# Altium PCB 电源板5.PcbDoc (part 1 of 3)
Units mm, origin at the board's own origin, x right, y up, seen from the top; angles counter-clockwise.
Board outline 181.19 x 72.37 mm, 2 copper layers (Top Layer, Bottom Layer), stack 0.325 mm thick; 121 components, 93 nets, 519 pads, 51 vias.
Unrouted connection lines stored in the file: 1.
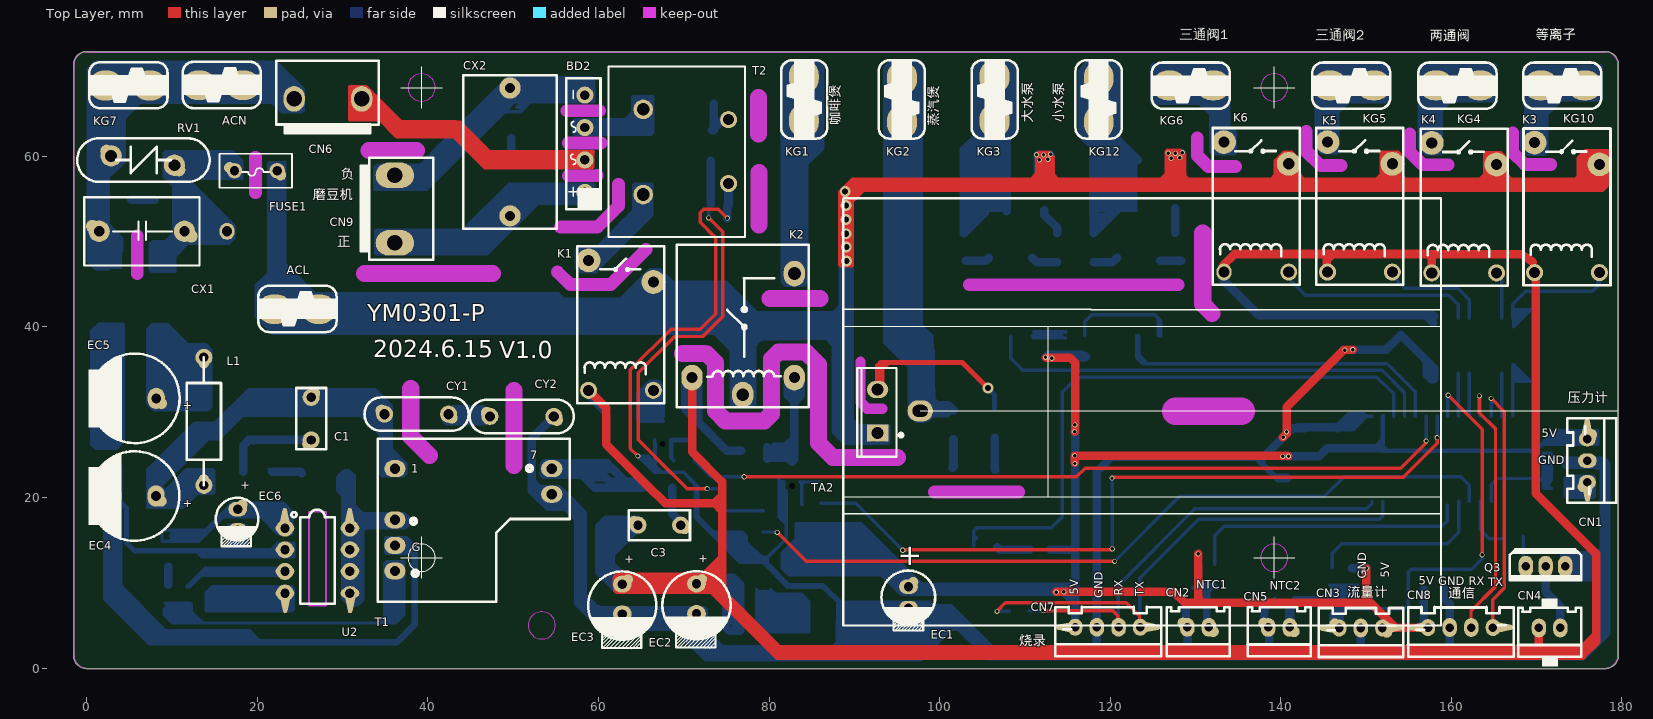
[diagram p0: Top Layer view]
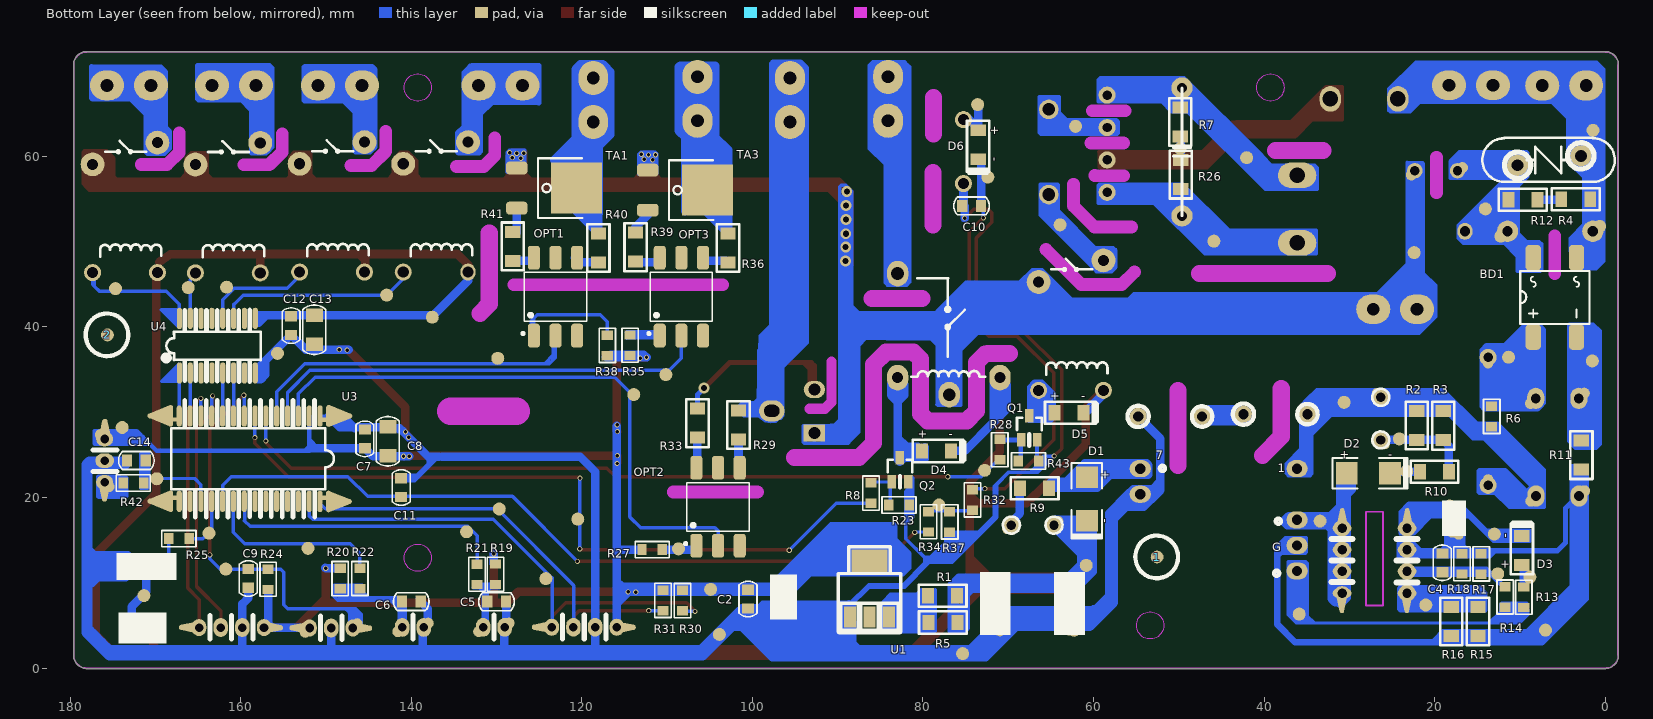
[diagram p1: Bottom Layer view, seen from below]

## Layer stack, top to bottom
Top Solder: solder mask 0.0102, Solder Resist, Dk 3.5
Top Layer: signal copper 0.0356
Dielectric 2: core 0.254, Dk 4.2
Bottom Layer: signal copper 0.0356
Bottom Solder: solder mask 0.0102, Solder Resist, Dk 3.5

## Board outline
-0.027,-0.064 cw(c0,1.5) -1.564,1.5 -1.564,70.738 cw(c0,70.738) 0,72.302 178.06,72.302 cw(c178.06,70.738) 179.624,70.738 179.624,1.501 cw(c179.56,1.494) 179.624,1.494 cw(c178.06,1.494) 179.624,1.462 179.624,1.404 cw(c179.56,1.404) 179.62,1.382 cw(c178.06,1.494) 178.079,-0.069 cw(c178.073,-0.006) 178.073,-0.07 0,-0.07 cw(c0,-0.006)

## Design rules (kind name [scope] priority, off if disabled: settings)
Clearance [All] p1: gap=0.4 ignorepadtopadclearanceinfootprint=FALSE except(0: Arc-Hole Track-Hole SMDPad-Hole THPad-Hole Via-Hole Fill-Hole Poly-Hole Region-Hole Text-Hole)
PolygonConnect [All] p1: connectstyle=Relief reliefconductorwidth=0.254 reliefentries=4 polygonreliefangle="90 Angle" airgapwidth=0.254
RoutingVias [All] p1: holewidth=0.4 width=0.6 viastyle="Through Hole" minholewidth=0.4 minwidth=0.6 maxholewidth=0.711 maxwidth=1.27
SolderMaskExpansion [All] p1: expansion=0.102 istentingtop=FALSE
Width [All] p1: maxlimit=1 minlimit=0.254 preferedwidth=0.4 minimp=50.000000 maximp=50.000000 favimp=50.000000
30 further rules are at their usual default settings.

## Components (designator, comment, footprint, x,y, rotation, side; value= is the part's Value field where it differs from the comment)
1 "MARK" MARK 52.546,13.019 r90 bottom
2 "MARK" MARK 175.645,39.064 r90 bottom
ACL "H1" 250 27.202,42.082 r180 top
ACN "H1" 250 18.319,68.348 r180 top
BD1 "DB107" DB107S 8.447,38.849 r90 bottom
BD2 "DB107" KBP410 58.405,55.786 r270 top
C1 "1nF/1KV" C5A 26.308,26.743 r90 top
C2 "100nF" C0805 100.516,8.085 r90 bottom
C3 "1nF/1KV" C5A 69.636,16.759 r180 top
C4 "47pF" C0805 19.093,12.336 r270 bottom
C5 "100nF" C0805 130.012,7.776 r0 bottom
C6 "100nF" C0805 140.012,7.788 r0 bottom
C7 "100nF" C0805 145.451,26.875 r90 bottom
C8 "10uF" C1206 142.765,26.59 r270 bottom
C9 "104" C0805 159.129,10.5 r270 bottom
C10 "100nF" C0805 74.302,54.191 r180 bottom
C11 "100nF" C0805 141.198,21.164 r90 bottom
C12 "100nF" C0805 154.101,40.155 r270 bottom
C13 "10uF" C1206 151.376,39.667 r90 bottom
C14 "104" C0805 172.253,24.338 r0 bottom
CN1 "JY-H600" CN-2.54-3-Z 175.969,26.857 r270 top
CN2 "MS Port" CN-2.54-2-Z 131.592,4.771 r180 top
CN3 "FM" CN-2.54-3-Z 151.946,4.692 r180 top
CN4 "LAMP" "CN2 (带扣)" 172.795,4.7 r180 top
CN5 "MS Port" CN-2.54-2-Z 141.074,4.761 r180 top
CN6 "AC-IN" VH-3A2#1 32.229,66.744 r180 top
CN7 "烧录" CN-2.54-4-Z 123.533,4.782 r180 top
CN8 "通信控制" CN-2.54-4-Z 164.904,4.747 r180 top
CN9 "AC-IN" VH-3A2#2 36.12,49.856 r90 top
CX1 "0.33uF/275V" "C-0.33uF-13/8 -AI" 6.443,51.218 r180 top
CX2 "0.68uF/275V" CX-18/11 49.628,53.022 r90 top
CY1 "222M/400V" "C-332-13/4A - AI" 34.916,29.771 r0 top
CY2 "222M/400V" "C-332-13/4A - AI" 47.267,29.503 r0 top
D1 "SS310" DO-214 60.783,19.827 r90 bottom
D2 "M7" DO-214 27.767,22.842 r0 bottom
D3 "F7" SOD-123 9.789,13.979 r270 bottom
D4 "F7" SOD-123 78.247,25.48 r0 bottom
D5 "F7" SOD-123 62.712,29.974 r0 bottom
D6 "F7" SOD-123 73.515,61.188 r90 bottom
EC1 "100uF/25V" EC6 96.36,9.533 r270 top
EC2 "470uF/25V" EC8 71.561,7.374 r270 top
EC3 "470uF/25V" EC8 62.865,7.329 r270 top
EC4 "10uF/400V" E-5-10-AI 8.111,20.173 r180 top
EC5 "10uF/400V" E-5-10-AI 8.138,31.625 r180 top
EC6 "10uF/50V" EC5 17.688,18.637 r270 top
FUSE1 "6.3A" FUSE-5/8.5/4 17.319,58.323 r0 top
K1 "GK32F-12VDC-S-A" REL-1#1 58.837,32.568 r90 top
K2 "GK32F-12VDC-S-A" RY-3FF 76.994,40.338 r90 top locked
K3 "GK32F-12VDC-S-A" REL-1#1 169.786,46.373 r90 top
K4 "GK32F-12VDC-S-A" REL-1#1 157.725,46.345 r90 top
K5 "GK32F-12VDC-S-A" REL-1#1 145.5,46.434 r90 top
K6 "GK32F-12VDC-S-A" REL-1#2 133.352,46.434 r90 top locked
KG1 "H2" 250 84.094,64.18 r90 top
KG2 "H2" 250 95.598,69.179 r270 top
KG3 "P1" 250 106.441,64.18 r90 top
KG4 "H1" 250 158.239,68.329 r0 top
KG5 "H1" 250 145.785,68.329 r0 top
KG6 "H1" 250 126.961,68.329 r0 top
KG7 "H1" 250 7.375,68.314 r180 top
KG10 "H1" 250 170.531,68.329 r0 top
KG12 "P1" 250 118.675,69.179 r270 top
L1 "1mH/0510" "R15/ 1W" 13.732,36.427 r270 top
OPT1 "MOC3021" 3021 125.648,39.182 r90 bottom
OPT2 "MOC3061" 3021 106.582,14.544 r90 bottom
OPT3 "MOC3021" 3021 110.884,39.182 r90 bottom
Q1 "2222A" SOT23-BCE 67.531,28.165 r270 bottom
Q2 "2222A" SOT23-BCE 82.709,23.244 r270 bottom
Q3 "D882" Q-TO126-ECB 171.066,11.917 r180 top
R1 "20R" R1206 76.019,8.524 r0 bottom
R2 "NC" R1206 22.073,26.768 r90 bottom
R3 "200K" R1206 18.959,26.744 r90 bottom
R4 "470K" R1206 5.124,54.936 r180 bottom
R5 "20R" R1206 75.991,5.374 r0 bottom
R6 "4.7K" R0805 13.305,29.504 r270 bottom
R7 "150K" R1206 49.788,62.368 r90 bottom
R8 "1K" R0805 86.092,20.508 r90 bottom
R9 "20R" R1206 68.586,21.054 r180 bottom
R10 "150R" R1206 21.699,22.996 r180 bottom
R11 "0R/1206" R1206 2.748,23.286 r90 bottom
R12 "470K" R1206 11.334,54.875 r180 bottom
R13 "10R" R0805 9.549,8.305 r270 bottom
R14 "22K/1%" R0805 11.723,8.328 r90 bottom
R15 "1.6R/1%" R1206 14.879,3.783 r90 bottom
R16 "1.6R/1%" R1206 18.08,7.13 r270 bottom
R17 "NC" R0805 14.539,12.209 r270 bottom
R18 "4.3K/1%" R0805 16.802,12.223 r270 bottom
R19 "10K/1%" R0805 130.137,11.002 r90 bottom
R20 "10K/1%" R0805 148.346,10.481 r90 bottom
R21 "4.7K" R0805 132.286,10.992 r90 bottom
R22 "4.7K" R0805 146.033,10.503 r90 bottom
R23 "10K" R0805 82.814,19.136 r0 bottom
R24 "4.7K" R0805 156.801,10.404 r270 bottom
R25 "1K" R0805 167.267,15.169 r180 bottom
R26 "150K" R1206 49.746,56.186 r90 bottom
R27 "510R" R0805 111.76,13.888 r0 bottom
R28 "1K" R0805 70.991,25.608 r90 bottom
R29 "180R" R1206 101.672,30.181 r270 bottom
R30 "10K" R0805 108.204,7.904 r270 bottom
R31 "10K" R0805 110.495,7.936 r270 bottom
R32 "2K" R0805 74.214,19.715 r270 bottom
R33 "180R" R1206 106.486,30.391 r270 bottom
R34 "1K" R0805 79.348,17.149 r90 bottom
R35 "510R" R0805 114.35,37.857 r270 bottom
R36 "180R" R1206 102.901,50.946 r270 bottom
R37 "2K" R0805 76.874,17.141 r270 bottom
R38 "510R" R0805 117.027,37.834 r270 bottom
R39 "180R" R1206 113.744,51.03 r270 bottom
R40 "180R" R1206 118.099,50.947 r270 bottom
R41 "180R" R1206 128.16,51.126 r270 bottom
R42 "1K" R0805 172.607,21.681 r180 bottom
R43 "10K" R0805 67.625,24.291 r0 bottom (schematic designator R?)
RV1 "10D471K" ZR-7.5-10 6.563,59.516 r180 top
T1 "XYT-E19135" EE19D 44.878,19.751 r90 top
T2 "TR-EE10B" 互感器 61.252,50.558 r90 top locked (schematic designator TR1)
TA1 "BT137" TO252 127.644,58.637 r270 bottom
TA2 "BTA16" 50*70 117.775,30.092 r0 top locked
TA3 "BT137" TO252 112.281,58.393 r270 bottom
U1 "AMS1117-5V" SOT-223 86.34,9.106 r270 bottom
U2 "PN6780H" DIP8 23.234,16.411 r270 top
U3 "OB38R16T1W28SP" SOP28-1.27 159.895,24.349 r270 bottom
U4 "ULN2003G" SOP16-1.27 167.203,34.602 r90 bottom

## Footprints (in the part's own frame and the unit in brackets; to place one, negate y for a bottom-side part, rotate by r counter-clockwise, add the part's x,y. Pads: shape width x height; smd on the part's side, far side on the other; paste and mask are expansions set on the pad)
50*70 [mm]
  rect 2.5x2 hole 1.4: 1(-25.035,-2.525)
  oval 3x2.5 hole 1.4 slot 1.8 at 0 deg: 2(-20.044,0.061)
  oval 2.5x2 hole 1.4: 3(-25.035,2.555)
  silkscreen extent -29.07,-25.11 41.05,25
250 [mm]
  oval 4x3.5 hole 1.5: 1(0,0) 1(5.151,0)
  silkscreen extent -2.09,-2.74 7.08,2.68
3021 [mm]
  rrect50% 2.8x1.422 smd: 1(-0.2,-0.008) 2(-0.2,-2.548) 3(-0.2,-5.088) 4(8.937,-5.088) 5(8.937,-2.548) 6(8.937,-0.008)
  silkscreen extent -0.11,-6.19 7.21,1.41
C5A [mm]
  oval 1.2x1.5 all layers, no hole rot 45: 1(-0.381,0.356) 2(5.385,-0.356)
  round 2 hole 1.1: 1(0,0) 2(5,0)
  silkscreen extent -1.1,-1.75 6.1,1.75
C0805 [mm]
  rect 1.2x1.4 smd: 1(-1.1,0) 2(1.1,0)
  silkscreen extent -2.08,-1.05 2.08,1.05
C1206 [mm]
  rect 1.6x2 smd: 1(-1.7,0) 2(1.7,0)
  silkscreen extent -2.91,-1.35 2.91,1.35
"C-0.33uF-13/8 -AI" [mm]
  round 1.5 all layers, no hole: 1(-5.8,0.584) 2(5.8,-0.584)
  round 2.5 hole 1.2: 1(-5,0) 2(5,0)
  silkscreen extent -6.75,-4 6.75,4
"C-332-13/4A - AI" [mm]
  oval 1.4x1.5 all layers, no hole rot 45: 1(-0.333,0.381) 2(7.833,-0.381)
  round 2 hole 1.2: 1(0,0) 2(7.5,0)
  silkscreen extent -2.36,-1.96 9.86,1.97
"CN2 (带扣)" [mm]
  oval 2x2.5 on Top Overlay: 1(0,0)
  oval 1.7x2.2 hole 1: 1(2.5,0) 2(0,0)
  silkscreen extent -2.45,-3.43 4.96,4.53
CN-2.54-2-Z [mm]
  round 0 all layers, no hole: 0(4.19,1.95)
  oval 1.7x2.2 hole 1: 1(2.54,0) 2(0,0)
  oval 1.3x1.5 all layers, no hole rot 45: 1(2.98,-0.424) 2(-0.44,0.424)
  oval 2x2.5 on Top Overlay: 2(0,0)
  silkscreen extent -2.45,-2.35 4.96,3.4
CN-2.54-3-Z [mm]
  round 0 all layers, no hole: 0(6.73,1.95)
  oval 1.7x2 hole 1: 1(5.08,0) 3(0,0)
  oval 1.3x1.5 all layers, no hole rot 45: 1(5.52,-0.424) 3(-0.44,0.424)
  oval 2.5x0.6 all layers, no hole: 1(6.09,0.016) 3(-1.09,-0.016)
  oval 0.6x2.2 all layers, no hole rot 102: 1(6.265,-0.168) 3(-1.265,0.168)
  oval 0.6x2.2 all layers, no hole rot 78: 1(6.267,0.206) 3(-1.267,-0.206)
  oval 1.7x2.2 hole 1: 2(2.54,0)
  oval 2x2.5 on Top Overlay: 3(0,0)
  silkscreen extent -2.45,-2.35 7.49,3.4
CN-2.54-4-Z [mm]
  round 0 all layers, no hole: 0(9.27,1.95)
  oval 1.7x2 hole 1: 1(7.62,0) 4(0,0)
  oval 2.5x0.6 all layers, no hole: 1(8.59,0.016) 4(-1.09,-0.016)
  oval 0.6x2.2 all layers, no hole rot 102: 1(8.765,-0.168) 4(-1.265,0.168)
  oval 0.6x2.2 all layers, no hole rot 78: 1(8.767,0.206) 4(-1.267,-0.206)
  oval 1.7x2.2 hole 1: 2(5.08,0) 3(2.54,0)
  oval 2x2.5 on Top Overlay: 4(0,0)
  silkscreen extent -2.45,-2.41 9.97,3.4
CX-18/11 [mm]
  round 2.5 hole 1.2: 1(0,0) 2(15,0)
  silkscreen extent -1.5,-5.5 16.5,5.5
DB107S [mm]
  rrect50% 3x1.8 smd: 1(-0.034,-0.009) 2(9.266,-5.089) 3(9.266,-0.009) 4(-0.034,-5.089)
  silkscreen extent 1.5,-6.62 7.7,1.51
DIP8 [mm]
  oval 2.2x2.8 on Top Overlay: 0(0,0)
  oval 2.2x2.8 on Bottom Overlay: 0(0,0)
  oval 0.5x2.2 all layers, no hole rot 78: 1(-1.267,-0.206) 4(8.887,0.206) 5(8.887,7.826) 8(-1.267,7.414)
  oval 0.5x2.2 all layers, no hole rot 102: 1(-1.265,0.168) 4(8.885,-0.168) 5(8.885,7.452) 8(-1.265,7.788)
  oval 2.5x0.5 all layers, no hole: 1(-1.09,-0.016) 4(8.71,0.016) 5(8.71,7.636) 8(-1.09,7.604)
  round 2 hole 1.1: 1(0,0) 2(2.54,0) 3(5.08,0) 4(7.62,0) 6(5.08,7.62) 7(2.54,7.62) 8(0,7.62)
  oval 1x2.2 all layers, no hole: 1(0,0) 2(2.54,0) 3(5.08,0) 4(7.62,0) 5(7.62,7.62) 6(5.08,7.62) 7(2.54,7.62) 8(0,7.62)
  oval 1.6x1.8 hole 1.1: 5(7.62,7.62)
  round 1.2 on Bottom Overlay: 22(-1.573,1.035)
  Keep-Out Layer lines w0.2: 9.07,2.807 -1.93,2.807 -1.93,4.807 9.07,4.807 9.07,2.807
  silkscreen extent -2.17,0.76 8.89,5.84
DO-214 [mm]
  rect 2.54x2.6 smd: A(2.54,0) K(-2.54,0)
  silkscreen extent -4.6,-1.77 4.2,1.78
E-5-10-AI [mm]
  oval 1.3x1.5 all layers, no hole rot 45: 1(-0.54,0.533) 2(5.62,-0.533)
  oval 2x2.5 hole 1.15: 1(0,0) 2(5.049,0)
  silkscreen extent -2.74,-5.25 7.94,5.25
EC5 [mm]
  oval 1.2x1.5 all layers, no hole rot 45: 1(-0.43,0.451) 2(2.883,-0.411)
  oval 1.7x2.2 hole 1.1: 1(0,0) 2(2.5,0)
  silkscreen extent -1.33,-2.57 4.41,2.43
EC6 [mm]
  oval 1.2x1.5 all layers, no hole rot 45: 1(-0.43,0.451) 2(2.883,-0.411)
  oval 1.7x2.2 hole 1.1: 1(0,0) 2(2.5,0)
  silkscreen extent -1.9,-3.18 5.19,3.12
EC8 [mm]
  oval 1.2x1.6 all layers, no hole rot 45: 1(-2.921,0.444) 2(2.921,-0.444)
  oval 2x2.2 hole 1.1: 1(-2.5,-0.064) 2(1,-0.063) 2(2.5,-0.063)
  silkscreen extent -4,-4.06 5.04,3.94
EE19D [mm]
  oval 2x2.5 hole 1.2: 1(3.627,8.754) 3(-2.373,8.754) 4(-5.373,8.754) 5(-8.373,8.754) 6(0.627,-9.646) 10(3.627,-9.646)
  round 0.1 all layers, no hole: 2(0.627,8.754)
  silkscreen extent -11.97,-11.75 7.13,10.75
FUSE-5/8.5/4 [mm]
  round 1.3 all layers, no hole: 1(-0.586,0.365) 2(5.409,-0.498)
  round 1.8 hole 1.1: 1(0,0) 2(5,0)
  silkscreen extent -1.75,-2 6.75,2
KBP410 [mm]
  round 2 hole 1.1: 1(0,0) 2(-3.8,0) 3(-7.6,0) 4(-11.4,0)
  silkscreen extent -13.4,-2.18 2,1.84
MARK [mm]
  round 1.5 smd: 0(0,0)
  round 4 on Bottom Solder: 0(0,0.05)
  silkscreen extent -2.49,-2.45 2.51,2.55
Q-TO126-ECB [mm]
  oval 1.7x2.5 hole 1: B(2.3,0) C(0,0) E(-2.3,0)
  silkscreen extent -4.2,-2 4.2,1.6
"R15/ 1W" [mm]
  round 2 hole 1.1: 1(0,0) 2(15,0)
  round 3 on Bottom Overlay: 1(0,0) 2(15,0)
  oval 1.6x1.2 all layers, no hole: 1(0.5,0) 2(14.5,0)
  oval 2.6x2.2 on Bottom Overlay: 1(0.5,0) 2(14.5,0)
  silkscreen extent 0,-2 15,2
R0805 [mm]
  rect 1.1x1.3 smd: 1(-1.2,0) 2(1.2,0)
  silkscreen extent -2,-0.96 2,0.97
R1206 [mm]
  rect 1.4x1.8 smd: 1(3.378,0.035) 2(-0.022,0.035)
  silkscreen extent -1.12,-1.26 4.48,1.34
REL-1#1 [mm]
  round 2 hole 1.3: 1(0,0) 2(0,-7.6)
  round 2.8 hole 1.3: 3(12.7,-7.6) 4(15.24,0)
  silkscreen extent -1.5,-8.9 16.9,1.3
REL-1#2 [mm]
  oval 2x1.8 hole 1.3: 1(0,0)
  round 2 hole 1.3: 2(0,-7.6)
  round 2.8 hole 1.3: 3(12.7,-7.6) 4(15.24,0)
  silkscreen extent -1.5,-8.9 16.9,1.3
RY-3FF [mm]
  oval 3x2.5 hole 1.3: 1(-6.28,6.02) 2(-6.28,-5.98)
  oval 3x2.5 hole 1.5: 3(-8.28,0.07) 4(5.92,-5.98)
  silkscreen extent -9.78,-7.68 9.32,7.82
SOD-123 [mm]
  rect 1.4x1.8 smd: A(1.88,0.025) K(-1.52,0.025)
  silkscreen extent -3.19,-1.27 2.98,1.33
SOP16-1.27 [mm]
  oval 2.5x0.6 smd: 1(0,0) 2(0,-1.27) 3(0,-2.54) 4(0,-3.81) 5(0,-5.08) 6(0,-6.35) 7(0,-7.62) 8(0,-8.89) 9(6.4,-8.89) 10(6.4,-7.62) 11(6.4,-6.35) 12(6.4,-5.08) 13(6.4,-3.81) 14(6.4,-2.54) 15(6.4,-1.27) 16(6.4,0)
  silkscreen extent -1.03,-9.53 7.41,1.69
SOP28-1.27 [mm]
  round 1.5 on Bottom Overlay: 0(-3.204,10.754)
  oval 3.2x0.6 smd rot 68: 1(-5.729,11.44) 14(-4.74,-9.552) 15(5.266,-9.546) 28(4.341,11.39)
  oval 1.8x0.6 smd: 1(-5.209,10.66) 14(-5.198,-8.82) 15(4.788,-8.814) 28(4.794,10.648)
  oval 2.5x0.6 smd: 1(-5.2,9.183) 1(-5.2,10.19) 2(-5.197,7.911) 3(-5.197,6.641) 4(-5.197,5.371) 5(-5.197,4.101) 6(-5.197,2.831) 7(-5.197,1.561) 8(-5.197,0.291) 9(-5.197,-0.979) 10(-5.197,-2.249) 11(-5.197,-3.519) 12(-5.197,-4.789) 13(-5.197,-6.059) 14(-5.207,-8.35) 14(-5.206,-7.329) 15(4.779,-8.344) 15(4.803,-7.329) 16(4.803,-6.059) 17(4.803,-4.789) 18(4.803,-3.519) 19(4.803,-2.249) 20(4.803,-0.979) 21(4.803,0.291) 22(4.803,1.561) 23(4.803,2.831) 24(4.803,4.101) 25(4.803,5.371) 26(4.803,6.641) 27(4.803,7.911) 28(4.803,10.178) 28(4.81,9.175)
  oval 1x0.6 smd: 1(-5.189,11.14) 1(-5.189,11.64) 14(-5.25,-9.832) 14(-5.218,-9.3) 15(4.768,-9.294) 15(4.806,-9.836) 28(4.814,11.128) 28(4.861,11.59)
  oval 0.5x2.8 smd: 1(-4.779,10.4) 14(-4.8,-8.462) 15(4.366,-8.446) 28(4.381,10.32)
  oval 3.2x0.6 smd rot 112: 1(-4.729,11.46) 14(-5.71,-9.552) 15(4.306,-9.556) 28(5.301,11.4)
  silkscreen extent -7.05,-8.29 6.67,10.81
SOT23-BCE [mm]
  round 0 hole 0.7 unplated: 0(1.9,-0.002)
  rect 1.6x1 smd: B(1.4,-0.953) C(-1.4,0) E(1.4,0.952)
  silkscreen extent -1.17,-1.45 2.08,1.45
SOT-223 [mm]
  rect 3x4.2 smd: 0(-3.29,0.065)
  rect 2.5x1.4 smd: 1(3.124,-2.235) 2(3.124,0.065) 3(3.124,2.365)
  silkscreen extent -5.12,-3.59 4.85,3.71
TO252 [mm]
  rrect50% 1.5x2.5 smd: 1(0,0) 3(4.7,0)
  rect 6x6 smd: 2(2.35,7)
  silkscreen extent -1.15,2.5 5.85,7.72
VH-3A2#1 [mm]
  oval 2.5x3 hole 1.8: 1(0,0) 2(7.92,0)
  silkscreen extent -1.98,-4.5 10.01,4.01
VH-3A2#2 [mm]
  oval 3x4.5 hole 1.8: 1(0,0) 2(7.92,0)
  silkscreen extent -1.98,-4.5 10.01,4.01
ZR-7.5-10 [mm]
  oval 1.5x1.8 all layers, no hole rot 45: 1(-4.14,1.001) 2(4.14,-1.001)
  round 2.5 hole 1.4: 1(-3.71,0.55) 2(3.71,-0.55)
  silkscreen extent -7.83,-2.63 7.69,2.51
互感器 [mm]
  round 2 hole 1.3: 1(13.75,-14) 2(6.25,-14)
  round 2.3 hole 1.5: 3(14.961,-4) 4(4.961,-4)
  silkscreen extent 0,-15.92 20,0.08

## Part data
ACL ACN KG1 KG2 KG3 KG4 KG5 KG6 KG7 KG10 KG12: library part P, "CN"
BD1 BD2: library part BRIDGE
C1 C2 C3 C4 C5 C6 C7 C8 C9 C10 C11 C12 C13 C14 CX1 CX2 CY1 CY2: library part CAP, "Capacitor"
CN1 CN3: library part CON3, "Connector"
CN2 CN5 CN6 CN9: library part CN2, "CN2"
CN4: library part CON2, "Connector"
CN7 CN8: library part CN4, "CN4"
D1 D2 D3 D4 D5 D6: library part DIODE2
EC1 EC2 EC3 EC4 EC5 EC6: library part "CAPACITOR POL", "Capacitor"
FUSE1: library part FUSE, "FUSE"
K1 K2 K3 K4 K5 K6: library part RELAY-SPST
L1: library part 滤波器M_1
OPT2: library part MOC3021
Q1 Q2 Q3: library part NPN, "NPN Transistor"
R1 R2 R3 R4 R5 R6 R7 R8 R9 R10 R11 R12 R13 R14 R15 R16 R17 R18 R19 R20 R21 R22 R23 R26 R27 R28 R29 R30 R31 R32 R33 R34 R35 R36 R37 R38 R39 R40 R41 R43: library part RES
R24 R25 R42: library part RES2
RV1: library part VDR
T1: library part EE
TA1 TA2 TA3: library part TRIAC
U1: library part IC-7805, "7805"
U2: library part 芯片-PN8680
U3: library part OB38RO8T1W28SP

## Free pads (board coordinates)
  round 1.524 smd far side: 2(1.427,63.06) 2(1.507,36.015) 2(6.996,4.442) 2(8.825,10.665) 2(11.326,36.449) 2(12.598,11.048) 2(12.997,15.711) 2(14.046,53.842) 2(21.033,7.393) 2(22.401,48.716) 2(23.262,23.061) 2(24.141,26.878) 2(30.615,31.158) 2(33.434,17.233) 2(35.881,6.321) 2(42.04,59.846) 2(45.885,50.061) 2(49.84,60.929) 2(60.856,12.04) 2(62.11,63.523) 2(63.925,51.973) 2(72.397,57.574) 2(72.772,23.191) 2(73.589,66.075) 2(75.349,1.681) 2(78.128,19.123) 2(103.878,3.941) 2(104.902,9.229) 2(108.674,13.978) 2(110.159,34.402) 2(113.919,32.072) 2(120.486,17.455) 2(124.233,10.478) 2(129.693,18.65) 2(129.869,36.322) 2(133.528,15.981) 2(137.549,41.141) 2(142.898,43.734) 2(152.124,14.039) 2(155.703,36.906) 2(161.662,44.66) 2(161.762,11.599) 2(163.735,15.812) 2(166.169,44.614) 2(169.847,22.194) 2(171.365,8.495) 2(173.922,28.211) 2(174.698,44.498)
  oval 1.8x2 hole 1.2: 2(16.443,51.218)

## Via types
v1: diameter 0.6, hole 0.4, Top Layer to Bottom Layer, 44 vias
v2: diameter 1.27, hole 0.711, Top Layer to Bottom Layer, 7 vias

## Nets (pads, with @x,y where several pads share a name; then routed paths per layer and width w, separated by ;. In a path a pad name is that pad's centre, name@x,y a point inside that pad or via, vN(x,y) a via of type N, cw(c..) or ccw(c..) an arc to the next point about the centre after c; other vN are vias at no path point)
+5V: C2.2 C7.1 C8.2 CN1.3@175.763,28.125 CN1.3@175.953,27.948 CN1.3@175.969,26.857 CN1.3@176.137,28.122 CN1.3@176.393,27.297 CN3.3@151.946,4.692 CN3.3@152.386,4.268 CN3.3@153.037,4.708 CN3.3@153.211,4.524 CN3.3@153.214,4.898 CN7.1 CN8.1 EC1.1 pad.2@104.902,9.229 pad.2@173.922,28.211 R19.2 R20.2 R24.2 R27.2 R30.1 R31.1 R35.2 R38.2 U1.2 U3.2 | length 390.4
  Top Layer w0.254: CN8.1@156.251,4.79 CN8.1@156.281,4.79
  Top Layer w1: v1@112.527,36.414 115.297,36.414 115.889,35.823 115.889,27.764 v1(115.842,27.716) ; v1@113.663,8.937 v1(114.576,8.937) 114.592,8.954 127.471,8.954 128.793,7.631 130.17,7.631 ; v1@115.864,24.097 115.836,24.125 v1(115.836,24.903) 140.857,24.903 v1(140.92,24.84) ; v1(130.333,13.394) 130.333,8.206 130.539,8 130.17,7.631 ; v1(150.036,11.681) 150.036,8.171 150.575,7.631 ; CN8.1@156.313,4.73 157.267,4.73 CN8.1@157.284,4.747 153.365,4.747 CN3.3@153.214,4.898 153.214,4.993 150.575,7.631 ; 130.17,7.631 150.575,7.631
  Bottom Layer w0.254: v1@140.823,24.744 140.903,24.824 v1(140.92,24.84) ; CN1.3@175.308,26.625 CN1.3@175.401,26.533 ; CN1.3@175.401,26.737 CN1.3@175.401,26.533 ; CN1.3@175.696,27.691 175.696,27.479 175.696,27.13 175.696,27.108 175.696,26.828 175.632,26.764 CN1.3@175.401,26.533
  Bottom Layer w0.4: 84.15,15.073 83.199,15.073 ; 86.275,12.395 83.212,12.395 83.199,12.383 ; 86.389,14.144 91.763,14.144 95.269,10.638 ; 93.985,10.945 93.985,10.619 ; 94.815,12.051 95.48,11.387 ; 95.428,11.387 95.48,11.387 ; C2.2@100.469,8.75 100.371,8.652 95.491,8.652 95.351,8.792 ; C2.2@100.486,8.784 100.478,8.792 95.351,8.792 ; C2.2@101.079,9.646 99.721,9.646 99.691,9.616 ; 113.672,36.463 R38.2@116.856,36.463 ; 115.053,8.794 114.23,9.616 ; 115.775,10.433 115.162,9.82 97.914,9.82 ; CN8.1@156.261,4.811 CN8.1@156.281,4.79 ; 83.199,12.383 83.199,11.128 83.382,10.945 ; 83.199,12.383 83.199,15.073 ; 83.199,15.073 83.153,15.073 81.567,13.487 81.567,11.703 82.325,10.945 83.382,10.945 ; 83.199,15.073 83.199,16.855 83.268,16.923 90.348,16.923 ; 83.382,10.945 93.138,10.945 ; 90.348,16.923 95.776,11.495 95.985,11.495 97.66,9.82 ; 90.348,16.923 90.81,16.923 97.914,9.82 ; 93.138,10.945 95.146,8.937 95.191,8.937 ; 93.138,10.945 93.659,10.945 93.985,10.619 ; 93.985,10.619 94.106,10.498 ; 94.106,10.498 94.219,10.611 94.219,10.757 94.365,10.611 94.365,10.238 ; 94.106,10.498 94.365,10.238 ; 94.365,10.238 94.38,10.223 ; 94.38,10.223 94.553,10.395 95.512,10.395 ; 94.38,10.223 95.2,9.403 ; 95.191,8.937 EC1.1@96.969,8.937 ; 95.191,8.937 95.191,8.898 95.207,8.898 ; 95.191,8.937 95.191,8.974 EC1.1@95.41,9.193 ; 95.2,9.403 EC1.1@95.41,9.193 ; 95.2,9.403 EC1.1@96.504,9.403 ; 95.207,8.898 95.314,8.792 95.351,8.792 ; 95.207,8.898 95.245,8.898 95.351,8.792 ; 95.269,10.638 95.484,10.638 95.727,10.395 ; 95.269,10.638 95.512,10.395 ; EC1.1@95.41,9.193 EC1.1@96.714,9.193 ; 95.48,11.387 95.682,11.387 EC1.1@97.249,9.82 ; 95.48,11.387 97.046,9.82 EC1.1@97.249,9.82 ; 95.512,10.395 95.727,10.395 ; 95.512,10.395 EC1.1@96.504,9.403 ; 95.727,10.395 96.306,10.395 EC1.1@96.972,9.729 ; 95.727,10.395 EC1.1@96.491,9.631 ; EC1.1@96.491,9.631 96.874,9.631 EC1.1@96.972,9.729 ; EC1.1@96.491,9.631 96.714,9.408 EC1.1@96.714,9.403 ; EC1.1@96.504,9.403 EC1.1@96.714,9.403 ; EC1.1@96.504,9.403 EC1.1@96.714,9.193 ; EC1.1@96.714,9.193 C2.2@100.15,9.193 ; EC1.1@96.714,9.193 EC1.1@96.969,8.937 ; EC1.1@96.714,9.193 EC1.1@96.714,9.403 ; EC1.1@96.714,9.403 97.298,9.403 EC1.1@96.972,9.729 ; EC1.1@96.969,8.937 100.406,8.937 C2.2@100.15,9.193 ; EC1.1@97.249,9.82 97.675,9.394 99.95,9.394 C2.2@100.15,9.193 ; EC1.1@97.249,9.82 97.66,9.82 ; 97.66,9.82 97.914,9.82 ; 97.66,9.82 97.864,9.616 98.117,9.616 ; 97.914,9.82 98.117,9.616 ; 98.117,9.616 99.691,9.616 ; 99.691,9.616 114.23,9.616 ; 114.23,9.616 114.706,9.616 115.446,8.876 115.446,9.236 ; 115.446,9.236 115.305,9.236 115.023,9.518 115.17,9.518 115.337,9.685 115.446,9.576 115.446,9.236
  Bottom Layer w0.5: 150.993,25.775 151.985,26.767 ; 151.625,25.775 151.918,25.482 152.469,25.482 ; U3.2@151.985,29.546 151.985,26.767 ; 170.875,26.359 170.935,26.3 177.14,26.3 177.169,26.328 177.169,27.795 177.161,27.787 CN1.3@175.793,27.787 ; CN1.3@175.696,27.13 CN1.3@175.718,27.108 ; CN1.3@175.953,27.948 CN1.3@175.793,27.787 ; CN1.3@175.969,26.857 CN1.3@175.718,27.108 ; CN1.3@176.081,27.091 176.063,27.108 CN1.3@175.718,27.108 ; CN1.3@176.312,26.417 176.305,26.411 170.819,26.411 ; CN1.3@176.347,26.618 176.201,26.764 175.632,26.764 174.769,26.764 ; CN1.3@176.516,27.432 176.469,27.479 175.696,27.479 CN1.3@175.484,27.479 ; 151.985,26.767 151.985,25.966 152.469,25.482 ; 152.469,25.482 169.891,25.482 170.819,26.411 ; 170.819,26.411 171.172,26.764 ; 171.172,26.764 174.769,26.764 ; 171.172,26.764 171.517,27.108 ; 171.517,27.108 171.887,27.479 ; 171.517,27.108 CN1.3@175.113,27.108 ; 171.887,27.479 172.196,27.787 CN1.3@175.793,27.787 ; 171.887,27.479 CN1.3@175.484,27.479 ; 174.769,26.764 CN1.3@175.113,27.108 ; CN1.3@175.113,27.108 CN1.3@175.484,27.479 ; CN1.3@175.113,27.108 175.696,27.108 CN1.3@175.718,27.108 ; CN1.3@175.484,27.479 175.696,27.691 CN1.3@175.793,27.787
  Bottom Layer w1: C2.2@100.406,8.937 v1(114.576,8.937) 115.913,7.601 ; R27.2@112.96,13.888 115.803,13.888 115.815,13.876 ; CN7.1@115.913,4.783 115.913,7.601 ; v1@115.933,28.414 115.913,28.394 115.913,7.601 ; R38.2@117.027,36.634 116.856,36.463 116.593,36.727 112.725,36.727 v1(112.428,36.429) 117.095,36.429 R38.2@117.196,36.529 ; R19.2@130.333,12.202 v1(130.333,13.394) ; v1(140.244,24.824) 140.903,24.824 144.499,24.824 C7.1@145.451,25.775 150.993,25.775 151.625,25.775 ; R20.2@148.346,11.681 v1(150.036,11.681) v1@150.122,11.767 ; CN3.3@153.037,4.708 156.291,4.708 CN8.1@156.313,4.73 156.801,5.218 R24.2@156.801,9.204
  other v1: 113.681,8.896 115.866,23.988 115.869,28.521 113.183,36.323
+12V: C3.2 C12.1 C13.2 CN4.1@170.295,4.7 D1.K D4.K D5.K EC2.1 EC3.1 K1.1 K2.1 K3.1 K4.1 K5.1 K6.1 pad.2@60.856,12.04 pad.2@137.549,41.141 R1.2 R5.2 U4.9 | length 584.9
  Top Layer w0.4: K2.1@71.857,34.058 K2.1@71.857,34.314 ; K6.1@133.261,46.434 K6.1@133.261,46.896 ; K3.1@169.567,46.403 169.567,47.606
  Top Layer w1: K1.1@58.837,32.568 60.92,30.485 60.92,26.222 66.754,20.388 66.793,20.388 67.832,19.349 73.604,19.349 ; K2.1@70.974,34.058 70.974,25.354 74.502,21.826 74.502,12.879 ; EC2.1@72.21,10.686 62.298,10.686 62.151,10.539 62.151,9.715 62.266,9.829 EC3.1@62.802,9.829 ; 74.224,9.202 74.126,9.202 ; 74.261,19.259 74.171,19.349 73.604,19.349 ; 74.322,20.068 73.604,19.349 ; 74.491,17.075 74.491,17.079 ; 74.499,18.122 74.499,18.454 73.604,19.349 ; K6.1@133.261,47.191 134.626,48.556 157.272,48.556 ; K5.1@145.41,46.434 145.41,47.866 145.929,48.385 ; K4.1@157.499,46.345 157.74,46.586 157.74,48.087 157.304,48.524 168.293,48.524 169.567,47.606 ; K3.1@169.567,46.403 169.902,46.068 169.902,20.498 177.017,13.383 177.017,3.887 ; CN4.1@170.295,4.7 170.295,2.69 169.781,2.176 ; EC3.1@62.802,9.829 62.847,9.874 EC2.1@71.497,9.874 ; EC3.1@62.802,9.829 62.802,9.816 62.188,9.202 73.288,9.202 ; EC2.1@71.497,9.874 74.502,12.879 ; EC2.1@71.497,9.874 EC2.1@72.312,9.874 ; EC2.1@72.312,9.874 72.616,9.874 ; EC2.1@72.312,9.874 72.909,10.471 74.502,10.471 ; 72.616,9.874 73.453,9.874 74.126,9.202 ; 72.616,9.874 73.288,9.202 ; 73.288,9.202 81.025,1.465 175.351,1.465 177.017,3.132 177.017,3.887 ; 73.288,9.202 74.126,9.202 ; 74.126,9.202 74.502,8.825 ; 74.502,8.825 74.502,10.471 ; 74.502,8.825 81.152,2.176 169.781,2.176 ; 74.502,10.471 74.502,12.879 ; 169.781,2.176 175.306,2.176 177.017,3.887
  Bottom Layer w0.4: D1.K@60.783,17.287 60.783,16.553 61.151,16.92 D1.K@61.329,17.098 ; EC3.1@62.802,9.829 63.536,10.563 EC3.1@63.583,10.61 ; EC2.1@71.514,10.189 76.035,10.189 ; R5.2@76.035,5.559 75.997,5.597 R1.2@75.997,7.733 ; 76.035,6.965 R1.2@76.035,7.695 ; 76.582,7.149 R1.2@76.035,7.695 ; K1.1@58.837,32.031 D5.K@60.919,29.949 ; K1.1@58.837,32.031 58.837,31.62 60.508,29.949 D5.K@60.919,29.949 ; K1.1@58.837,32.031 K1.1@58.837,32.568 61.191,30.213 D5.K@61.191,29.949 D5.K@60.919,29.949 ; R1.2@75.997,7.733 R1.2@75.997,8.489 R1.2@76.035,8.527 ; R1.2@75.997,7.733 R1.2@76.035,7.695 ; R1.2@76.035,7.695 R1.2@76.035,8.527 ; R1.2@76.035,8.527 76.269,8.761 76.269,10.095 76.269,10.103 76.183,10.189 76.175,10.189 76.035,10.189 ; R1.2@76.035,8.527 76.035,9.725 76.035,10.189
  Bottom Layer w1: D1.K@60.783,16.553 60.783,12.904 ; 61.411,14.422 61.411,14.406 ; C3.2@64.636,17.098 C3.2@64.251,16.713 ; K2.1@70.433,34.598 K2.1@70.974,34.058 ; 71.976,28.562 71.698,28.84 ; R5.2@75.997,5.597 75.997,5.367 R5.2@75.969,5.339 75.969,6.643 74.971,7.641 ; R1.2@75.997,8.489 75.144,9.342 75.144,9.874 ; 76.035,9.725 75.886,9.874 75.144,9.874 ; D4.K@76.727,25.455 75.084,25.455 71.698,28.84 ; K6.1@133.352,46.434 133.352,45.425 137.41,41.367 C13.2@151.376,41.367 157.036,41.367 ; 157.918,40.485 157.036,41.367 ; 157.995,41.26 157.968,41.26 157.861,41.367 157.036,41.367 ; 60.783,12.904 60.978,12.904 61.411,13.336 ; 60.783,12.904 60.783,11.847 EC3.1@62.284,10.346 ; D1.K@60.783,17.287 60.108,16.611 60.108,11.299 61.578,9.829 ; D1.K@60.783,17.287 61.151,16.92 D1.K@61.411,16.659 ; D1.K@60.783,17.287 60.901,17.404 64.474,17.404 64.474,17.337 C3.2@64.251,17.115 C3.2@64.251,16.713 ; 61.411,13.336 61.411,12.186 62.284,11.312 ; 61.411,13.336 63.489,15.414 ; 61.411,13.336 61.411,14.406 ; 61.411,14.406 62.175,15.169 62.175,15.414 ; 61.411,14.406 61.411,15.572 ; 61.411,15.572 61.569,15.414 62.175,15.414 ; 61.411,15.572 D1.K@61.411,16.659 ; D1.K@61.411,16.659 D1.K@61.626,16.444 ; 61.578,9.829 EC3.1@62.802,9.829 ; 61.578,9.829 62.131,9.277 74.303,9.277 74.971,8.608 74.971,7.641 ; D1.K@61.626,16.444 62.459,16.444 ; D1.K@61.626,16.444 62.175,15.895 62.175,15.414 ; 62.175,15.414 63.489,15.414 ; EC3.1@62.284,10.346 62.284,11.312 ; EC3.1@62.284,10.346 EC3.1@62.802,9.829 ; 62.284,11.312 63.033,10.563 63.536,10.563 75.801,10.563 76.175,10.189 76.269,10.095 76.62,9.744 76.62,4.386 76.586,4.352 75.371,4.352 74.971,4.752 74.971,7.641 ; 62.459,16.444 63.489,15.414 ; 62.459,16.444 63.982,16.444 C3.2@64.251,16.713 ; EC3.1@62.802,9.829 71.452,9.829 EC2.1@71.497,9.874 75.144,9.874 ; 63.489,15.414 64.251,16.177 C3.2@64.251,16.713 ; 70.974,29.565 K2.1@70.974,34.058 ; 70.974,29.565 70.154,30.384 70.154,33.239 K2.1@70.974,34.058 ; 70.974,29.565 71.698,28.84 ; K2.1@70.974,34.058 71.698,33.333 71.698,28.84